# Altium PCB TNY268PN_12V_1A_SMPS.PcbDoc
Units mm, origin at the board's own origin, x right, y up, seen from the top; angles counter-clockwise.
Board outline 58.67 x 39.37 mm, 2 copper layers (Top Layer, Bottom Layer); 22 components, 16 nets, 56 pads, 0 vias.
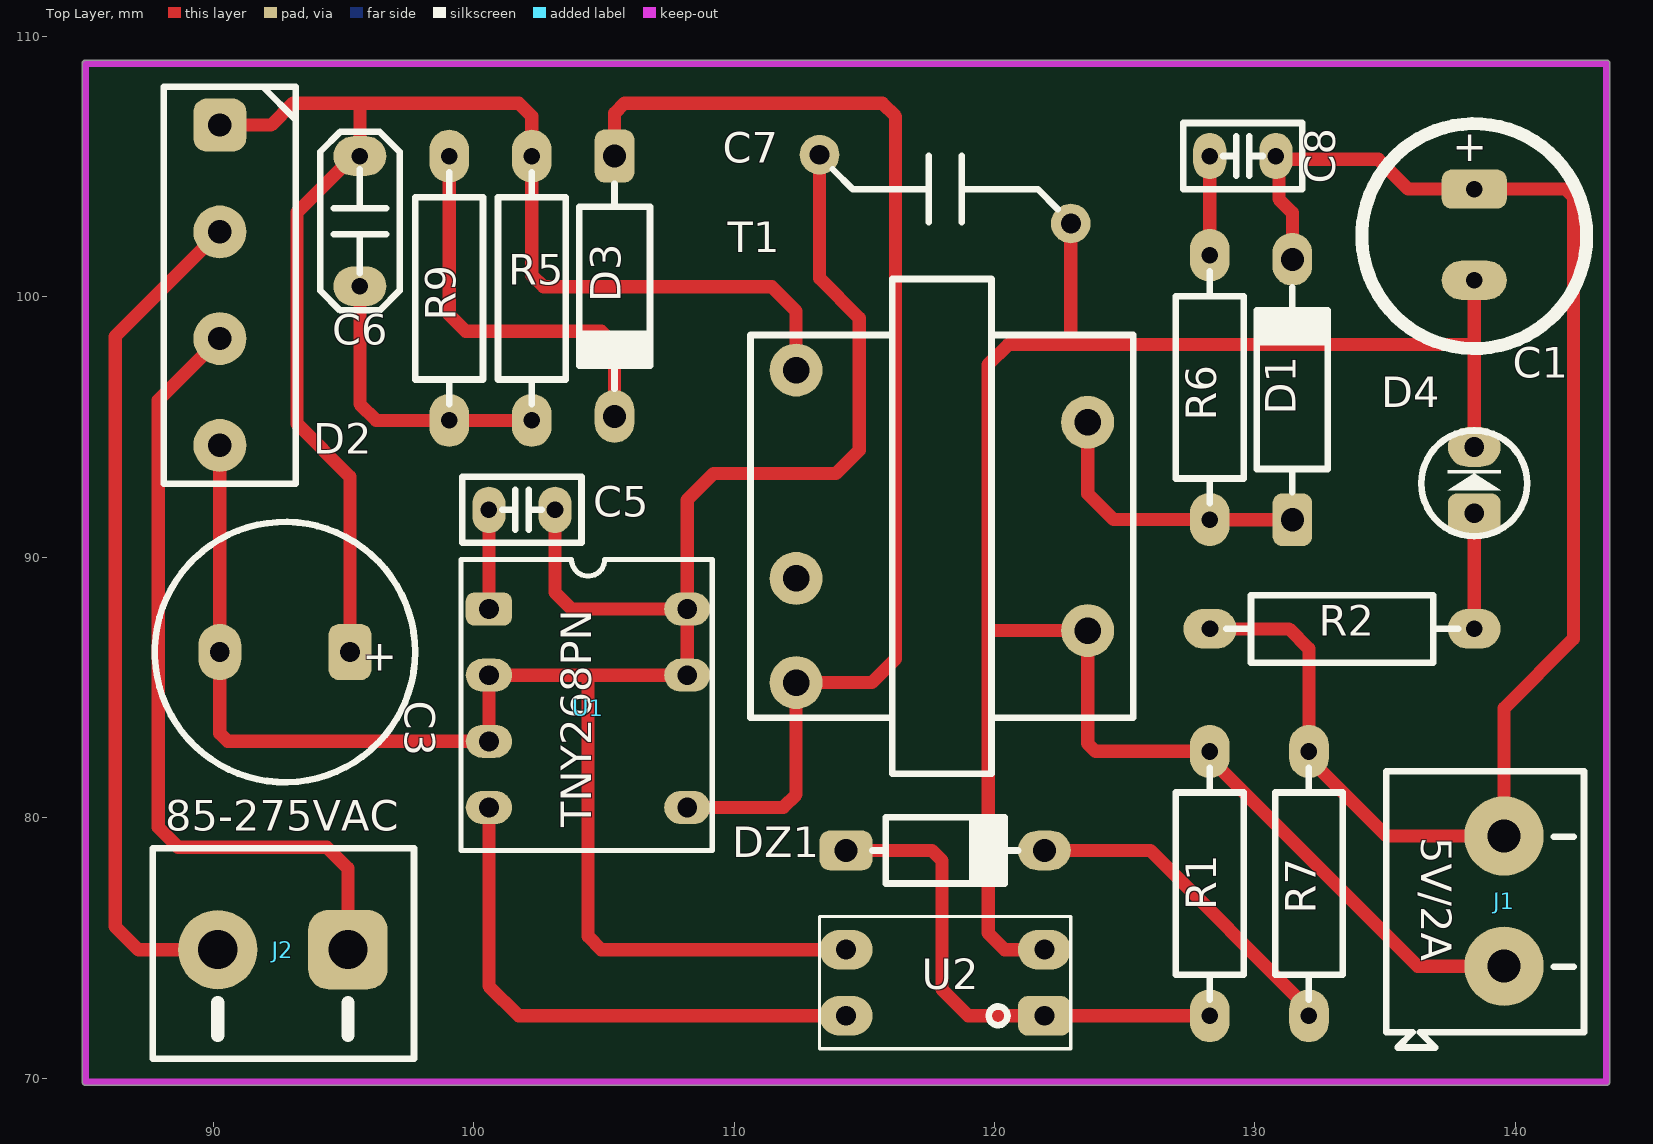
[diagram p0: Top Layer view]
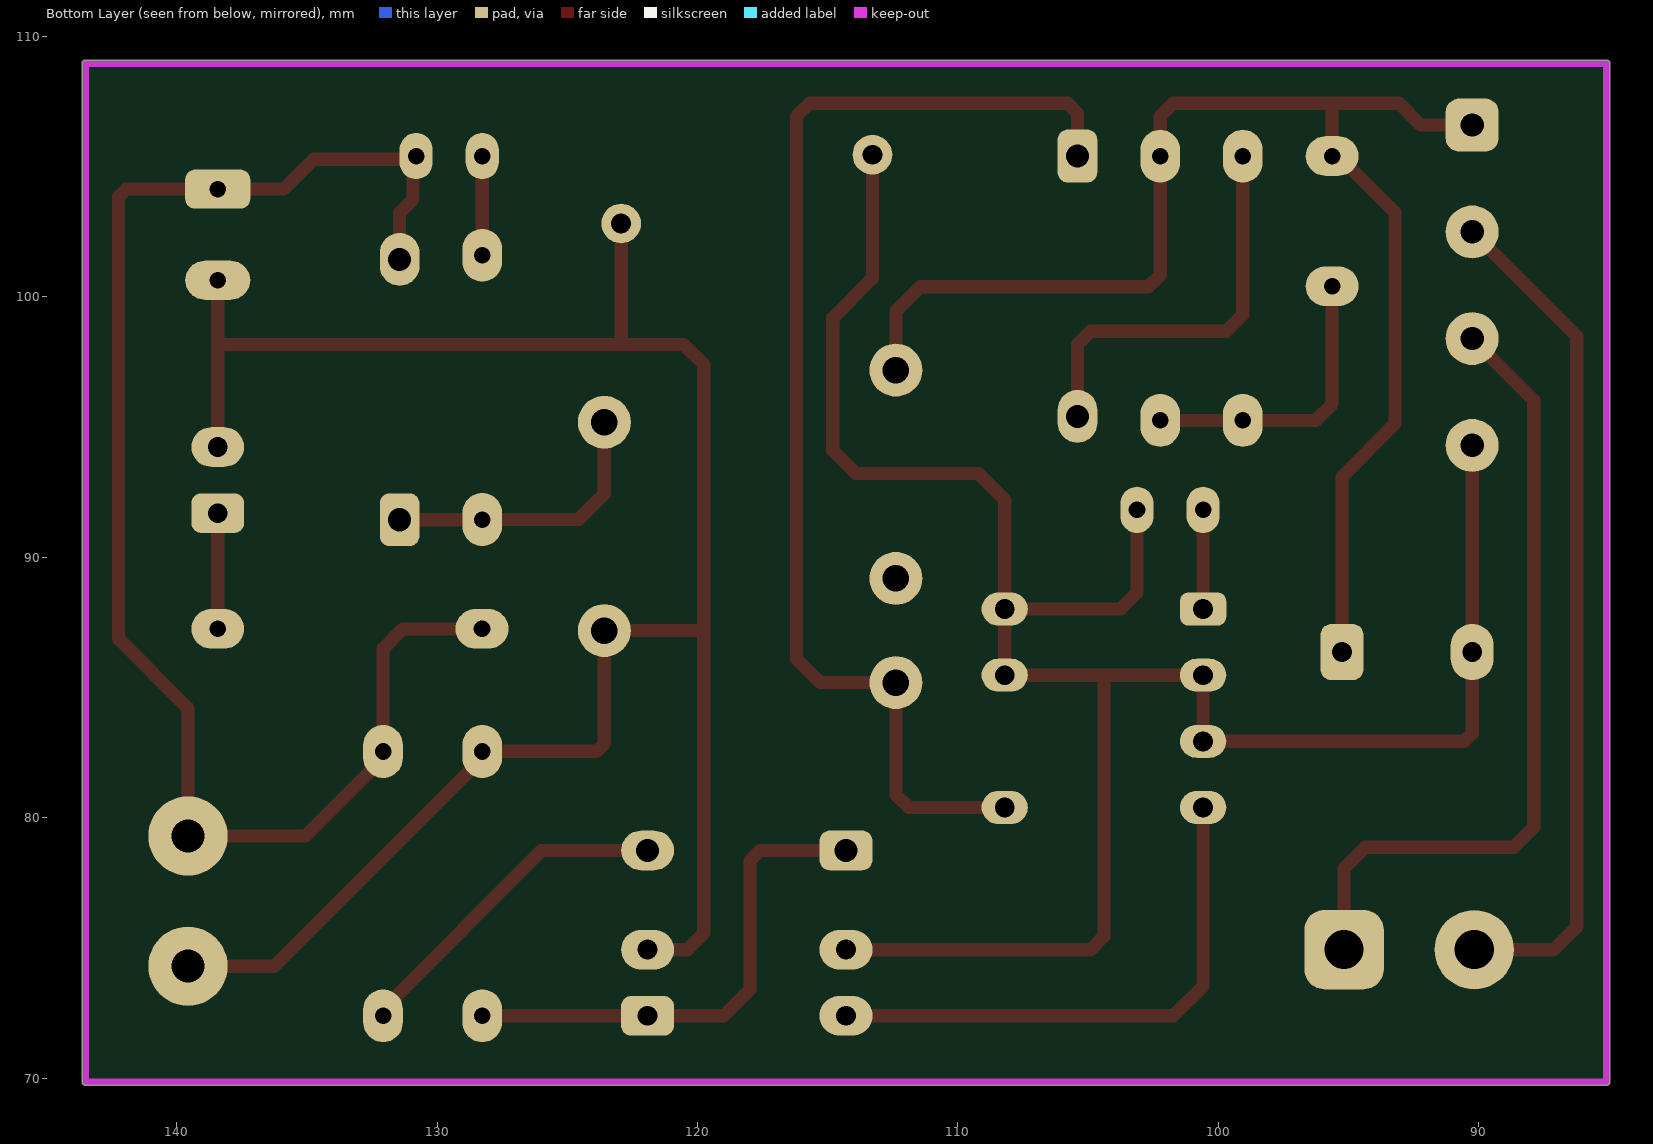
[diagram p1: Bottom Layer view, seen from below]
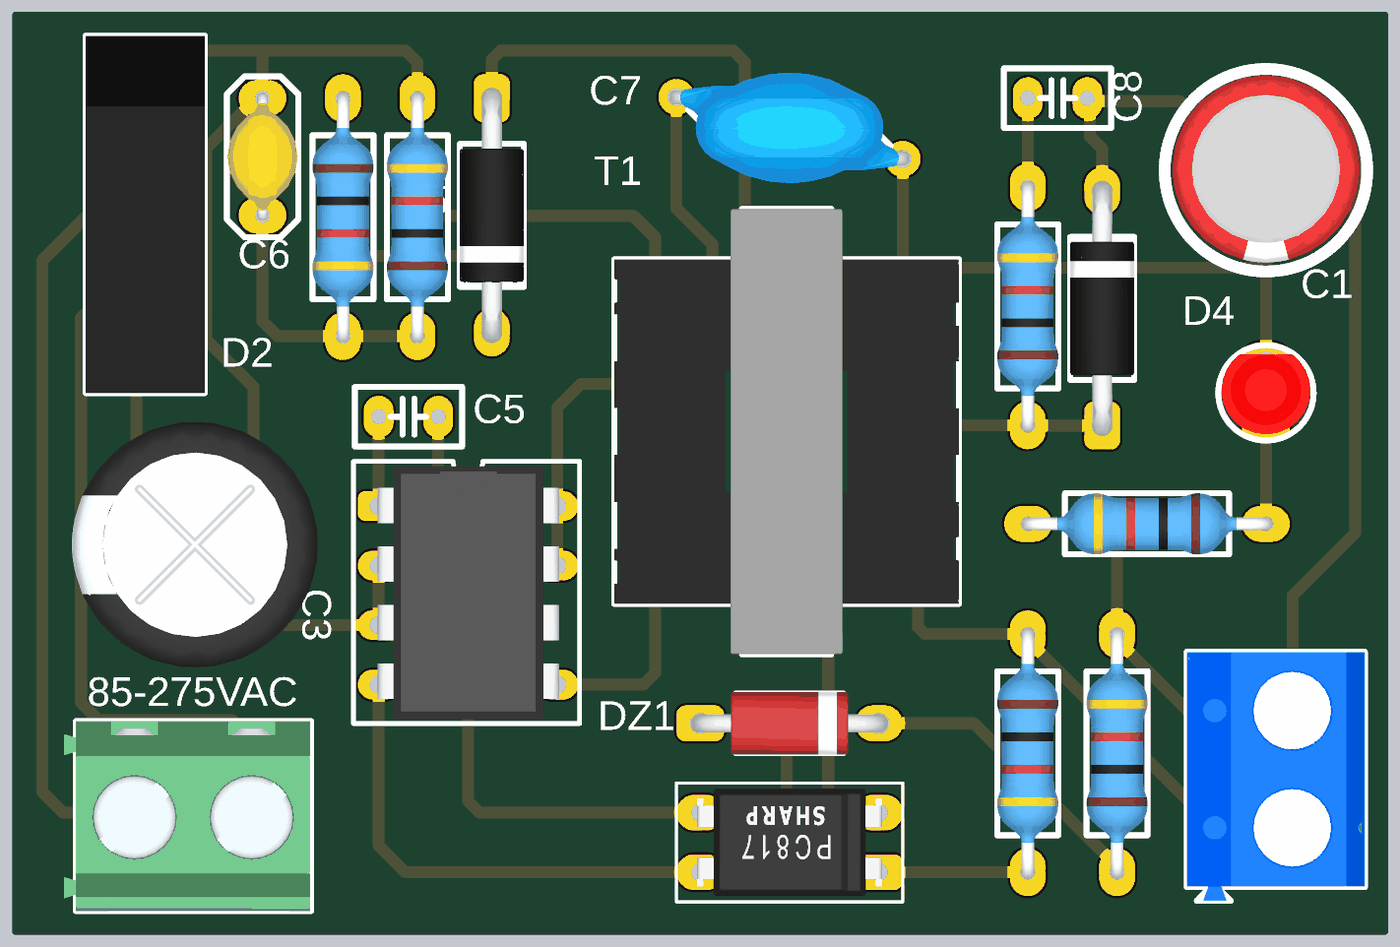
[diagram p2: 3D render of the assembled board from above, using the file's embedded part models]

## Layer stack, top to bottom
Top Solder: solder mask 0.0102, Solder Resist, Dk 3.5
Top Layer: signal copper 0.0356
Dielectric 1: dielectric 0.32, FR-4, Dk 4.8
Bottom Layer: signal copper 0.0356
Bottom Solder: solder mask 0.0102, Solder Resist, Dk 3.5

## Board outline
84.963,69.85 ccw(c85.09,69.85) 85.09,69.723 143.51,69.723 ccw(c143.51,69.85) 143.637,69.85 143.637,108.966 ccw(c143.51,108.966) 143.51,109.093 85.09,109.093 ccw(c85.09,108.966) 84.963,108.966

## Design rules (kind name [scope] priority, off if disabled: settings)
Clearance [All] p1: gap=0.254 ignorepadtopadclearanceinfootprint=FALSE except(0: Arc-Hole Track-Hole SMDPad-Hole THPad-Hole Via-Hole Fill-Hole Poly-Hole Region-Hole Text-Hole)
PolygonConnect [All] p1: connectstyle=Relief reliefconductorwidth=0.254 reliefentries=4 polygonreliefangle="90 Angle" airgapwidth=0.254
RoutingVias [All] p1: holewidth=0.711 width=1.27 viastyle="Through Hole" minholewidth=0.711 minwidth=1.27 maxholewidth=0.711 maxwidth=1.27
SolderMaskExpansion [All] p1: expansion=0.102 istentingtop=FALSE
Width [All] p1: maxlimit=0.762 minlimit=0.254 preferedwidth=0.508
30 further rules are at their usual default settings.

## Components (designator, comment, footprint, x,y, rotation, side; value= is the part's Value field where it differs from the comment)
C1 "1000uF/16V" CAP_RAD_3.5mm 138.43,102.335 r270 top
C3 "10uF/400V" CAP_RAD_D10x12.5_POL_BK 92.75,86.36 r180 top
C5 "104" CAP_Ceramic_Disc_2 101.854,91.821 r180 top
C6 "471/1kV" CAP_DISC_4x3_YL 95.631,102.91 r90 top
C7 "222M/400V" CAP_DISC_Y2222 118.11,104.14 r0 top
C8 "104" CAP_Ceramic_Disc_2 129.54,105.41 r0 top
D1 "1N5148" DO-41 131.445,96.44 r90 top
D2 "KBP206" DIODE-KBP206 90.25,100.45 r270 top
D3 "1N4007" DO-41 105.41,100.41 r270 top
D4 "LED" LED_3MM_RED 138.43,92.964 r90 top
DZ1 "3V3" "DO-35 Horizontal" 118.11,78.74 r0 top
J1 "5V/2A" DG306-5.0-02P-12-00AH 139.573,76.795 r90 top
J2 "85-275VAC" DG127-5.0-02P-14-00AH 95.17,74.93 r180 top
R1 "470R" RES-0.25W-H-MF 128.27,77.465 r270 top
R2 "470R" RES-0.25W-H-MF 133.355,87.249 r180 top
R5 "100K" RES-0.25W-H-MF 102.235,100.33 r90 top
R6 "100R" RES-0.25W-H-MF 128.27,96.525 r90 top
R7 "330R" RES-0.25W-H-MF 132.08,77.465 r90 top
R9 "100R" RES-0.25W-H-MF 99.06,100.33 r270 top
T1 "EE19(3+2)" TRANSFORMER-EE19(3+2) 117.983,91.186 r0 top
U1 "TNY268PN" DIP8-TNY268 104.334,84.511 r0 top
U2 "PC817" DIP4 118.11,73.66 r180 top

## Footprints (in the part's own frame and the unit in brackets; to place one, negate y for a bottom-side part, rotate by r counter-clockwise, add the part's x,y. Pads: shape width x height; smd on the part's side, far side on the other; paste and mask are expansions set on the pad)
CAP_Ceramic_Disc_2 [mil]
  oval 50x70 hole 25: 1(-50,0) 2(50,0)
  silkscreen extent -90,-50 90,50, body extent -92,-49 92,49, height 289
CAP_DISC_4x3_YL [mil]
  oval 60x80 hole 25: 1(-98.44,0) 2(98.44,0)
  silkscreen extent -135,-60 135,60, body extent -107,-59 107,59, height 215
CAP_DISC_Y2222 [mil]
  round 60 hole 30: 1(-190,52) 2(190,-52)
  silkscreen extent -170,-50 170,50, body extent -202,-93 202,93, height 354
CAP_RAD_3.5mm [mm]
  rrect50% 1.5x2.5 hole 0.635: 1(-1.805,0)
  oval 1.5x2.5 hole 0.635: 2(1.695,0)
  silkscreen extent -4.32,-4.31 4.32,4.32, body extent -4.06,-4 3.94,4, height 11.33
CAP_RAD_D10x12.5_POL_BK [mil]
  rrect50% 65x85 hole 30: 1(-98.43,0)
  oval 65x85 hole 30: 2(98.43,0)
  silkscreen extent -197,-197 197,197, body extent -207,-207 207,207, height 551
DG127-5.0-02P-14-00AH [mil]
  rrect50% 120x120 hole 59.06: 1(0,0)
  round 120 hole 59.06: 2(196.85,0)
  silkscreen extent -100,-154 295,165, body extent -98,-154 315,165, height 398
DG306-5.0-02P-12-00AH [mil] "• Current rating: 10 A AC/DC  • Voltage rating: 300 V AC/DC  • Temperature range: -30° ~ +120°  • Applicable wire: 22-14AWG UL (0.5 - 1.5mm² IEC)"
  round 120 hole 50: 1(-98.43,0) 2(98.43,0)
  silkscreen extent -221,-121 197,178, body extent -221,-121 196,178, height 394
DIODE-KBP206 [mil]
  rrect50% 80x80 hole 35: 1(-242.13,0)
  round 80 hole 35: 2(-80.71,0) 3(80.71,0) 4(242.13,0)
  silkscreen extent -300,-85 300,115, body extent -300,-85 300,115, height 530
DIP4 [mil]
  rrect50% 80x60 hole 30: 1(-150,50)
  oval 80x60 hole 30: 2(-150,-50) 3(150,-50) 4(150,50)
  silkscreen extent -190,-100 190,100, body extent -155,-90 155,90, height 169
DIP8-TNY268 [mm]
  rrect50% 1.778x1.27 hole 0.762: 1(-3.75,3.5)
  oval 1.778x1.27 hole 0.762: 2(-3.75,-1.58) 2(-3.75,0.96) 2(3.87,0.96) 2(3.87,3.5) 4(-3.75,-4.12) 5(3.87,-4.12)
  silkscreen extent -4.83,-5.77 4.83,5.4, body extent -3.81,-5.6 3.96,5.2, height 4.5
"DO-35 Horizontal" [mil]
  rrect50% 80x60 hole 35: 1(-150,0)
  oval 80x60 hole 35: 2(150,0)
  silkscreen extent -110,-50 110,50, body extent -165,-52 166,53, height 112
DO-41 [mil]
  rrect50% 80x60 hole 35: 1(-196.85,0)
  oval 80x60 hole 35: 2(196.85,0)
  silkscreen extent -155,-54 155,54, body extent -214,-54 214,54, height 132
LED_3MM_RED [mil]
  rrect50% 60x80 hole 30: 1(-50,0)
  oval 60x80 hole 30: 2(50,0)
  silkscreen extent -85,-80 75,80, body extent -75,-75 60,75, height 223
RES-0.25W-H-MF [mil]
  oval 80x60 hole 25: 1(-199.8,0) 2(199.8,0.01)
  silkscreen extent -175,-51 175,51, body extent -211,-51 211,51, height 106
TRANSFORMER-EE19(3+2) [mil]
  round 80 hole 40: 1(-220.47,236.22) 2(-220.47,-78.74) 3(-220.47,-236.22) 4(220.47,-157.48) 5(220.47,157.48)
  silkscreen extent -289,-374 289,374, body extent -289,-374 289,374, height 665

## Part data
C1 C3: library part Capacitor(Radian)
C5 C6 C7 C8: library part Capacitors(Disc)
D1 D3: library part Diode-1N4007
D2: library part Diode-KBP206
D4: library part "LED 3MM"
DZ1: library part Diode-Zener
J1: library part DG306-5.0-02P-12-00AH
J2: library part DG127-5.0-02P-14-00AH
R1 R2 R5 R6 R7 R9: library part "Resistors THD"
T1: library part TRANS-EE19-VERTICAL(3+2)
U1: "TinySwitch-II: TNY263, TNY264, TNY265, TNY266, TNY267 a TNY268"

## Nets (pads, with @x,y where several pads share a name; then routed paths per layer and width w, separated by ;. In a path a pad name is that pad's centre, name@x,y a point inside that pad or via, vN(x,y) a via of type N, cw(c..) or ccw(c..) an arc to the next point about the centre after c; other vN are vias at no path point)
GND: C1.2 C7.2 D4.2 J1.1 R1.1 T1.4 U2.2 | length 82.1
  Top Layer w0.508: U2.2 120.396,74.93 119.761,75.565 119.761,87.249 ; 122.936,98.298 C7.2 ; D4.2 138.43,98.044 ; C1.2 138.43,98.044 ; J1.1 136.261,74.295 128.27,82.286 R1.1 128.26,82.55 123.881,82.55 123.583,82.848 T1.4 119.824,87.186 119.761,87.249 ; 119.761,87.249 119.761,97.409 120.523,98.171 138.303,98.171 138.43,98.044
NetC1_1: C1.1 C8.2 D1.2 J1.2 R2.2 R7.2 | length 58.9
  Top Layer w0.508: R2.2 131.318,87.249 132.08,86.487 R7.2 132.08,82.286 135.071,79.295 J1.2 139.573,84.201 142.24,86.868 142.24,103.842 141.942,104.14 135.89,104.14 134.747,105.283 130.937,105.283 C8.2@130.925,105.295 ; C8.2 C8.2@130.925,105.295 ; D1.2 131.445,103.239 130.925,103.759 C8.2@130.925,105.295
NetC3_1: C3.1 C6.2 D2.1 R5.2 T1.1 | length 54.7
  Top Layer w0.508: D2.1 92.218,106.6 93.06,107.442 95.631,107.442 ; C3.1 95.25,93.091 93.218,95.123 93.218,103.251 95.377,105.41 C6.2 95.631,107.442 ; T1.1 112.383,99.453 111.445,100.391 106.995,100.391 102.682,100.391 102.235,100.838 R5.2 102.235,106.934 101.727,107.442 95.631,107.442
NetC3_2: C3.2 C5.1 C7.1 D2.4 U1.2 U2.3 | length 86.7
  Top Layer w0.508: D2.4@90.433,94.116 D2.4 C3.2 90.25,83.232 90.551,82.931 100.584,82.931 100.584,85.471 104.394,85.471 ; C5.1 103.124,88.646 103.759,88.011 U1.2@108.204,88.011 ; C7.1 113.284,100.711 114.808,99.187 114.808,94.107 113.919,93.218 109.22,93.218 108.204,92.202 U1.2@108.204,88.011 ; U2.3 104.902,74.93 104.394,75.438 104.394,85.471 ; 104.394,85.471 108.204,85.471 U1.2@108.204,88.011
NetC5_2: C5.2 U1.1 | length 3.8
  Top Layer w0.508: U1.1 C5.2
NetC6_1: C6.1 R5.1 R9.2 | length 11.4
  Top Layer w0.508: C6.1 95.631,95.885 96.261,95.255 R9.2 R5.1
NetC8_1: C8.1 R6.2 | length 3.8
  Top Layer w0.508: R6.2 C8.1
NetD1_1: D1.1 R6.1 T1.5 | length 11
  Top Layer w0.508: T1.5 123.583,92.444 124.577,91.45 R6.1 128.275,91.445 131.44,91.445 D1.1
NetD2_2: D2.2 J2.2 | length 32.7
  Top Layer w0.508: J2.2 87.122,74.93 86.233,75.819 86.233,98.483 D2.2
NetD2_3: D2.3 J2.1 | length 30.8
  Top Layer w0.508: D2.3 87.884,96.034 87.884,79.629 88.646,78.867 94.361,78.867 95.17,78.058 J2.1
NetD3_1: D3.1 T1.3 U1.5 | length 46.5
  Top Layer w0.508: D3.1 105.41,107.061 105.791,107.442 115.697,107.442 116.205,106.934 116.205,86.106 115.285,85.186 T1.3 112.383,80.887 111.887,80.391 U1.5
NetD3_2: D3.2 R9.1 | length 15.7
  Top Layer w0.508: R9.1 99.06,99.314 99.695,98.679 104.902,98.679 105.41,98.171 D3.2
NetD4_1: D4.1 R2.1 | length 4.4
  Top Layer w0.508: R2.1 D4.1
NetDZ1_1: DZ1.1 R1.2 U2.1 | length 19.5
  Top Layer w0.508: DZ1.1 117.602,78.74 117.983,78.359 117.983,73.406 118.999,72.39 U2.1 R1.2
NetDZ1_2: DZ1.2 R7.1 | length 12.9
  Top Layer w0.508: DZ1.2 125.984,78.74 132.08,72.644 R7.1
NetU1_4: U1.4 U2.4 | length 21
  Top Layer w0.508: U1.4 100.584,73.533 101.727,72.39 U2.4
pads on no net: T1.2

## Keep-outs
Keep-Out Layer:
  lines w0.254: 85.09,69.85 85.09,108.966 143.51,108.966 143.51,69.85 85.09,69.85

## Text inside footprints (layer, text, board x,y; h text height)
C1: Top Overlay "+" at 138.938,104.817 h2
C3: Top Overlay "+" at 97.068,87.053 h2 r180